# EAGLE board uClouds_002-frontpanelV7 (EAGLE 8.5.0)
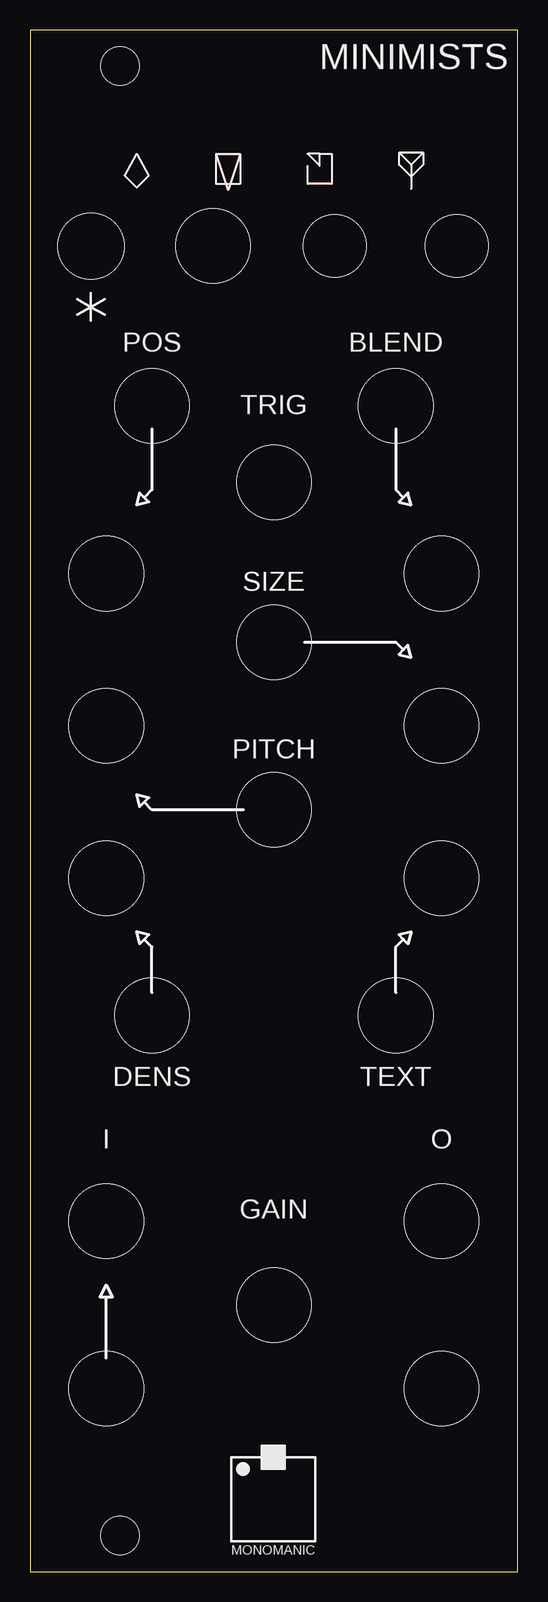
[diagram p0: board, top side]
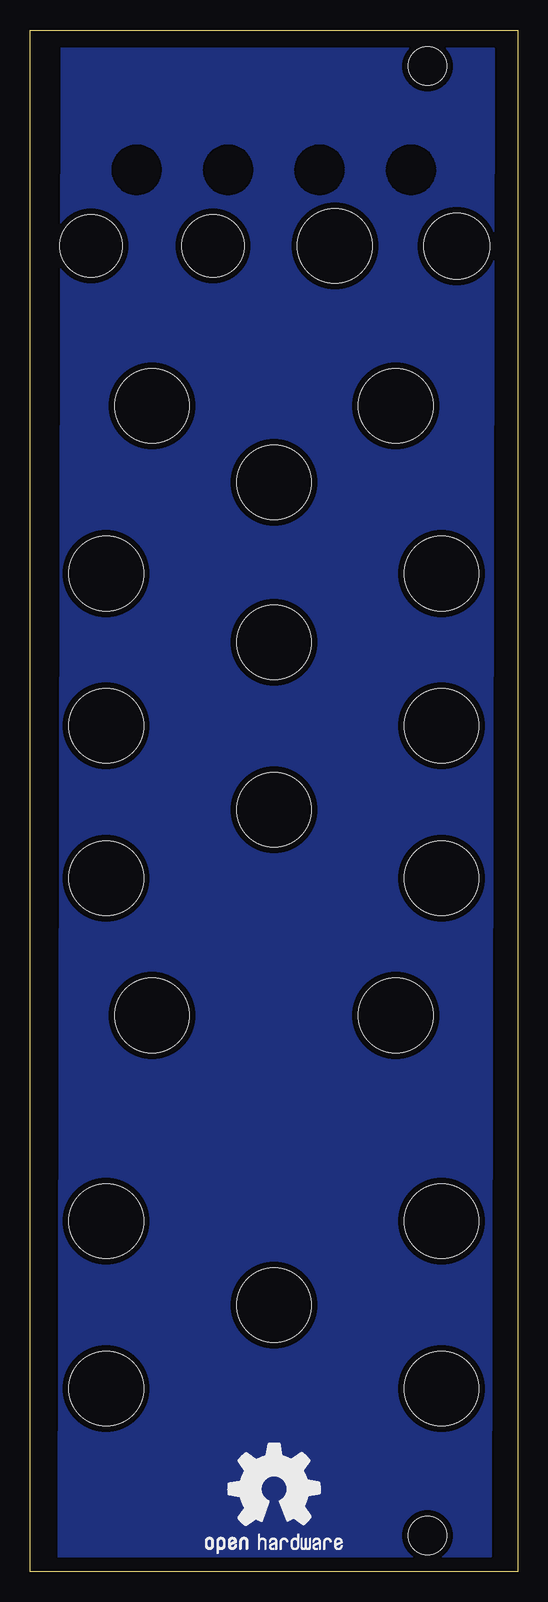
[diagram p1: board, bottom side, seen from below]

Size 40.64 x 128.5 mm. Coordinates in mm from the lower left corner, seen from the top.
Outline: 0,0 40.64,0 40.64,128.5 0,128.5 0,0
Copper layers (1*16): Top 0.035mm / dielectric 1.6mm / Bottom 0.035mm
Design rules "Elecrow_2-layer_PCB_eagle_rule": minimum track width 6mil, minimum drill 12mil, track to track 6mil, track to pad 6mil, pad to pad 6mil, via to via 8mil, smd to smd 0mil, copper to edge 20mil, drill to drill 10mil, minimum pad ring 6mil, minimum via ring 6mil, stop-mask expansion 0mil, vias tented up to drill 100mil, thermal gap 10mil
Holes 3.2 mm at 7.5,125.5 7.5,3
Holes 5.5 mm at 5.08,110.49
Holes 6.2 mm at 15.24,110.49 10.16,97.16 30.48,97.16 20.32,90.81 34.29,83.19 6.35,83.19 6.35,70.48 34.29,70.48 34.29,57.78 6.35,57.78 30.48,46.35 10.16,46.35 34.29,29.21 34.29,15.24 6.35,15.24 6.35,29.21 20.32,63.5 20.32,77.47 20.32,22.23
Holes 5.2 mm at 25.4,110.49 35.56,110.49

## Placement (x,y rotation side)
E$1  [LOGO-LARGE]  16.76,2.54 0 top
E$2  [OSHW1]  26.67,-0.25 0 bottom

## Library data of the parts
E$1 = monomanic-logopack
E$2 = bfl

## Tracks (layer width: path | path; a pad name or v marks a point on that pad's centre or on a via)
S$1
  Top 0.15: 8.89,115.36 9.89,116.36 8.89,118.18 7.9,116.36
  Top 0.152: 8.89,115.36 7.9,116.36
S$2
  Top 0.15: 15.52,118.16 17.52,118.16 16.52,115.16 15.52,118.16 | 17.52,115.66 15.52,115.66 15.52,118.16
  Top 0.152: 17.52,118.16 17.52,115.66
S$3
  Top 0.15: 23.13,118.17 24.13,118.17 24.13,117.17 | 25.13,118.17 25.13,115.66 23.13,115.66 23.13,117.17
  Top 0.152: 23.13,118.17 24.13,117.17 | 24.13,118.17 25.13,118.17
S$4
  Top 0.15: 32.76,118.27 32.76,117.27 31.76,116.27 30.76,117.27 30.76,118.27 | 30.76,118.27 32.76,118.27 | 31.76,117.27 31.76,115.27 | 32.76,118.27 31.76,117.27 | 31.76,117.27 30.76,118.27
S$6
  pour Bottom: 2,127 2.25,1.22 38.25,1.22 38,127
S$7
  cutout Bottom: 6.86,116.84 arc-90 8.89,118.87 arc-90 10.92,116.84 arc-90 8.89,114.81 arc-90
S$8
  cutout Bottom: 14.48,116.84 arc-90 16.51,118.87 arc-97 18.54,116.59 arc-84 16.51,114.81 arc-88
S$9
  cutout Bottom: 22.1,116.84 arc-90 24.13,118.87 arc-90 26.16,116.84 arc-90 24.13,114.81 arc-90
S$10
  cutout Bottom: 29.72,116.84 arc-90 31.75,118.87 arc-90 33.78,116.84 arc-90 31.75,114.81 arc-90

## Text on the board
tNames: MINIMISTS | POS | BLEND | TRIG | SIZE | PITCH | DENS | TEXT | I | O | GAIN
bStop: Too weird to live, too rare to die | Custom frontpanel by monomanic / Rotterdam | Creative Commons CC-BY-SA-3.0 | uClouds design by Jason H. J. Lim | original design by Mutable Instruments